# Altium PCB PCB1.PcbDoc
Units mm, origin at the board's own origin, x right, y up, seen from the top; angles counter-clockwise.
Board outline 178.23 x 55.18 mm, 2 copper layers (Top Layer, Bottom Layer); 55 components, 55 nets, 241 pads, 11 vias.
Unrouted connection lines stored in the file: 17.
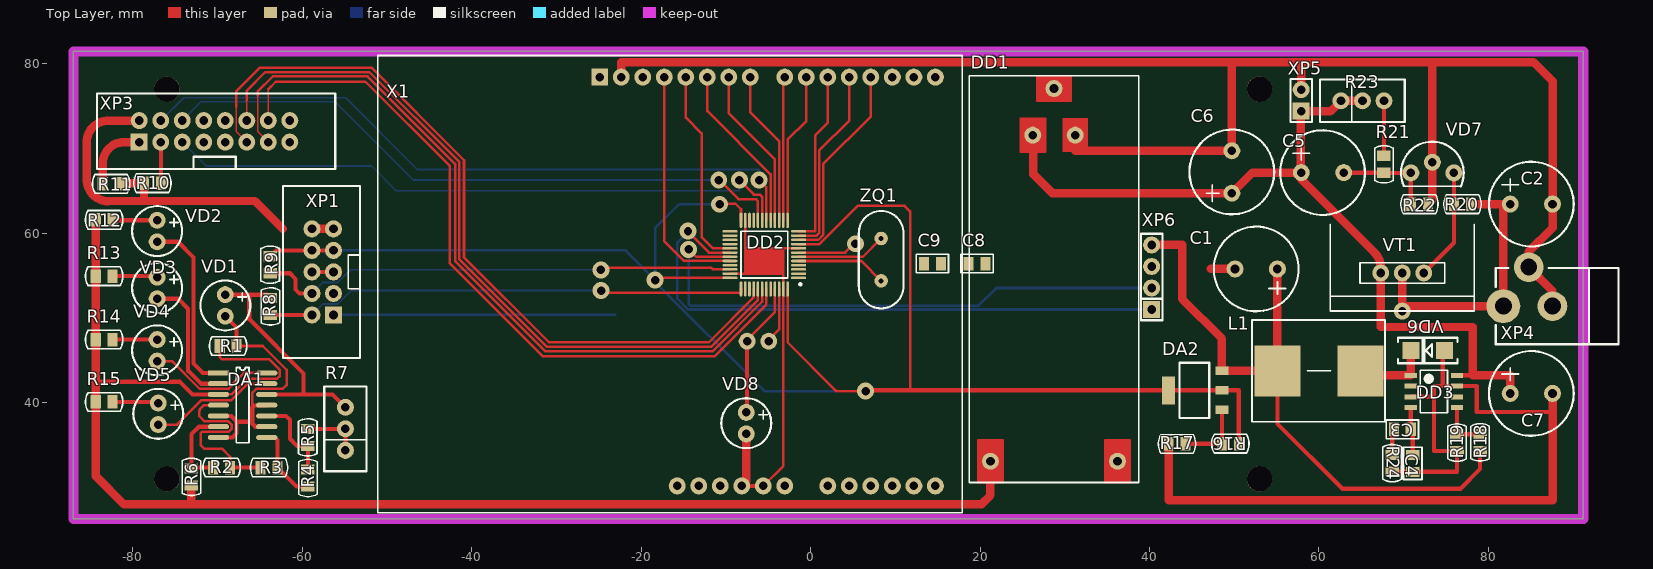
[diagram p0: Top Layer view]
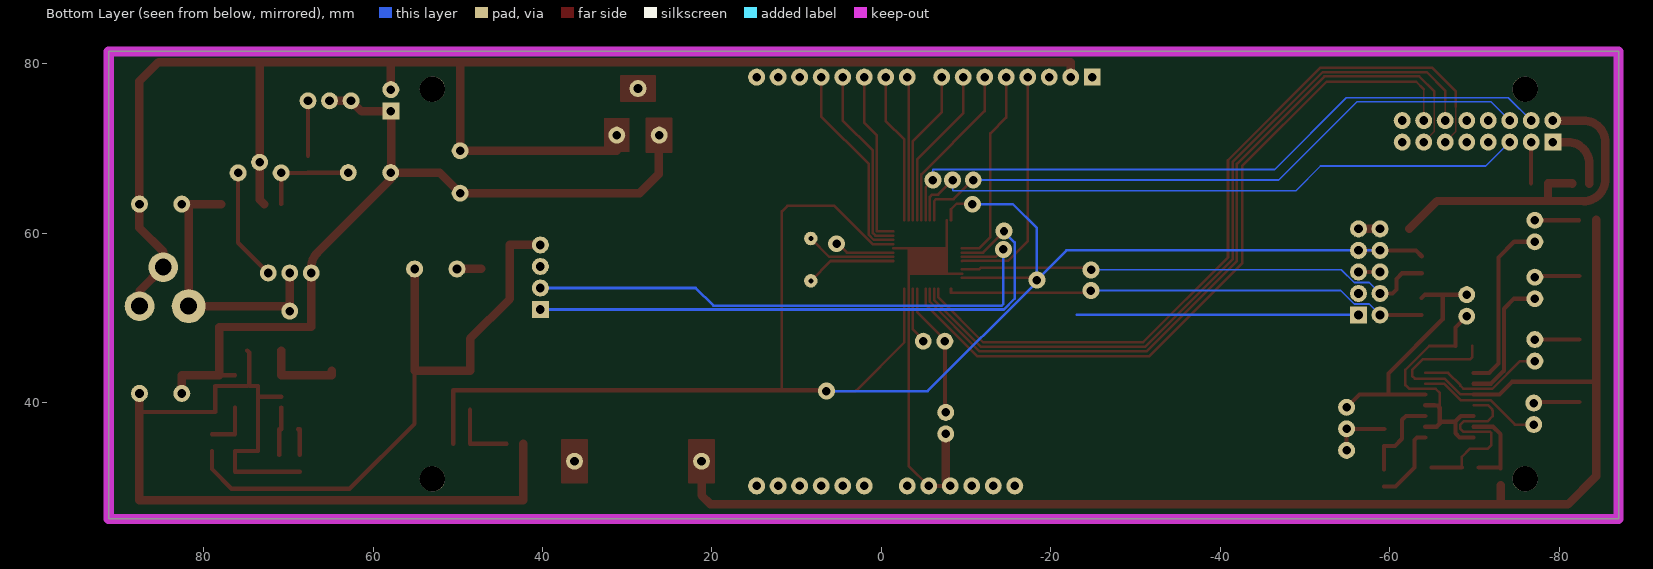
[diagram p1: Bottom Layer view, seen from below]
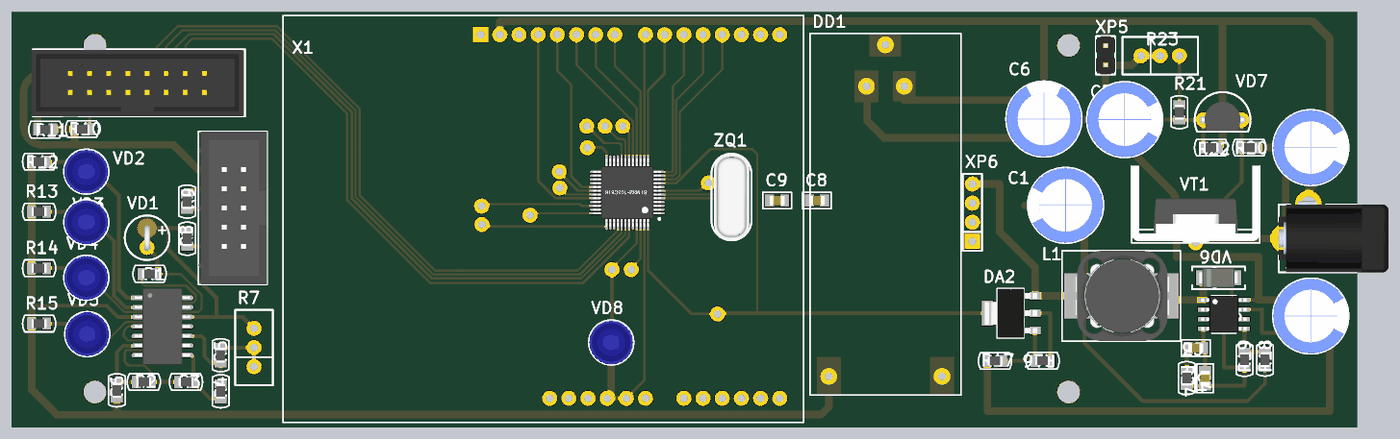
[diagram p2: 3D render of the assembled board from above, using the file's embedded part models]

## Layer stack, top to bottom
Top Solder: solder mask 0.0102, Solder Resist, Dk 3.5
Top Layer: signal copper 0.0356
Dielectric 1: dielectric 0.32, FR-4, Dk 4.8
Bottom Layer: signal copper 0.0356
Bottom Solder: solder mask 0.0102, Solder Resist, Dk 3.5

## Board outline
-87.025,26.3 91.2,26.3 91.2,81.475 -87.025,81.475

## Design rules (kind name [scope] priority, off if disabled: settings)
Clearance Clearance_1 [((ObjectKind = 'Pad') And (Component = 'DD2')) Or ((ObjectKind = 'Net') And (Component = 'DD2')) vs WithinRoom('RoomSTM')] p1: gap=0.19
Clearance [All] p2: gap=0.15
ComponentClearance [All] p1 off: gap=0.254 collisioncheckmode=3 verticalgap=0.254 showdistances=FALSE
Height [All] p1 off: minheight=0 maxheight=25.4 prefheight=12.7
Length [All] p1: maxlimit=2540 minlimit=0
MatchedLengths [InNetClass('SW')] p1: tolerance=10 checknetsindiffpair=TRUE checkdiffpairvsdiffpair=TRUE checkothers=TRUE
PolygonConnect [All] p1: connectstyle=Relief reliefconductorwidth=0.5 reliefentries=4 polygonreliefangle="90 Angle" airgapwidth=0.254
RoomDefinition RoomSTM [InComponentClass('Room Definition 1')] p1: confinementstyle=ConfineIn formatcopy=TRUE lockcomponents=FALSE outline -11.026,51.936 -11.026,63.044 0.082,63.044 0.082,51.936
RoutingVias [All] p1: holewidth=1.04 width=2 viastyle="Through Hole" minholewidth=1 minwidth=2 maxholewidth=1.1 maxwidth=2
SolderMaskExpansion [All] p1: expansion=0.102
UnpouredPolygon [All] p1: allowunpoured=FALSE
Width Width_2 [InNetClass('POWER')] p1: maxlimit=5 minlimit=0.254 preferedwidth=2
Width Width_1 [InNetClass('STM')] p2: maxlimit=0.5 minlimit=0.2 preferedwidth=0.3
Width [All] p3: maxlimit=5 minlimit=0.2 preferedwidth=1
27 further rules are at their usual default settings.

## Classes and differential pairs
component class "Room Definition 1": DD2
net class POWER: 5.0V GND
net class LCD: D4 D5 D6 D7
net class SW: NRST SWCLK SWDIO
net class STM: 3.3V D4 D5 D6 D7 DIR_CLK DIR_EN DIR_LATCH DIR_SER E GND NRST OSCI OSCO PWM0A PWM0B PWM1A PWM1B PWM2A PWM2B R/W RS RX SWCLK SWDIO TX

## Components (designator, comment, footprint, x,y, rotation, side; value= is the part's Value field where it differs from the comment)
C1 "470/16" ECAP_10_5 52.6,55.8 r180 top
C2 "22uF" ECAP_10_5 85.079,63.459 r0 top
C3 "0.01u" C0805 69.85,36.875 r0 top
C4 "100p" C0805 71.075,32.85 r90 top
C5 "4.7uF" ECAP_10_5 60.425,67.175 r0 top
C6 "22uF" ECAP_10_5 49.725,67.25 r90 top
C7 "100/100" ECAP_10_5 85.079,41.107 r0 top
C8 "22p" C0805 19.651,56.436 r0 top
C9 "22p" C0805 14.376,56.436 r0 top
DA1 "*" SOP14 -69.909,43.53 r0 top
DA2 "LM117" SOT-223 45.3,41.475 r90 top
DD1 "REV1.4" 20A8.4ÂREV1.2 18.725,30.6 r0 top
DD2 "*" LQFP-48 -5.472,57.49 r180 top
DD3 "A5975" SOIC8 73.572,41.337 r0 top
L1 "CDRH127/LDNP-220MC" CDRH127 55.107,43.774 r0 top
R1 "510" R0805 -68.766,46.705 r180 top
R2 "1k" R0805 -69.53,32.358 r180 top
R3 "1k" R0805 -63.942,32.358 r180 top
R4 "1k" R0805 -59.343,31.124 r270 top
R5 "15k" R0805 -59.368,35.91 r270 top
R6 "5.1k" R0805 -73.1,31.25 r270 top
R7 "10k" T93YA -54.923,36.926 r90 top
R8 "5.1k" R0805 -63.775,51.375 r270 top
R9 "5.1k" R0805 -63.8,56.3 r270 top
R10 "5.1k" R0805 -77.7,65.925 r180 top
R11 "5.1k" R0805 -82.575,65.85 r180 top
R12 "1k" R0805 -83.4,61.6 r180 top
R13 "1k" R0805 -83.4,54.96 r180 top
R14 "1k" R0805 -83.4,47.467 r180 top
R15 "1k" R0805 -83.4,40.101 r180 top
R16 "2k" R0805 49.55,35.175 r0 top
R17 "3.3k" R0805 43.248,35.142 r0 top
R18 "3.3k" R0805 79.025,35.325 r270 top
R19 "1k" R0805 76.3,35.3 r90 top
R20 "510" R0805 76.951,63.459 r0 top
R21 "100" R0805 67.68,68.158 r90 top
R22 "3.3k" R0805 71.871,63.459 r180 top
R23 "10k" T93YA 65.14,75.651 r0 top
R24 "10k" R0805 68.65,32.875 r90 top
VD1 "BZX55C5V1" DO-35 -69.1,51.5 r270 top
VD2 "RED" LED-5mm -77.15,60.275 r270 top
VD3 "YELLOW" LED-5mm -77.148,53.563 r270 top
VD4 "GREEN" LED-5mm -77.148,46.197 r270 top
VD5 "GREEN" LED-5mm -77.021,38.704 r270 top
VD6 "STPS1L40A" DO-214AC 72.85,46.175 r180 top
VD7 "TL431" TO-92 73.395,67.142 r180 top
VD8 "*" LED-5mm -7.6,37.6 r270 top
VT1 "IRFB3806" TO-220+FK 69.839,55.331 r180 top
X1 "RKP" "ARDUINO SHIELD" -24.9,78.45 r0 top
XP1 "*" IDC10M -57.6,55.45 r180 top
XP3 "*" IDC16M -70.375,72.05 r90 top
XP4 "*" DJK-02-Series 87.619,52.41 r270 top
XP5 "JAMPER" PLS-2 57.9,75.7 r90 top
XP6 "JAMPER" PLS-4 40.248,53.553 r90 top
ZQ1 "*" HC-49S 8.325,56.9 r270 top

## Footprints (in the part's own frame and the unit in brackets; to place one, negate y for a bottom-side part, rotate by r counter-clockwise, add the part's x,y. Pads: shape width x height; smd on the part's side, far side on the other; paste and mask are expansions set on the pad)
20A8.4ÂREV1.2 [mm]
  round 2 hole 1.02: 1(2.5,2.5) 2(17.5,2.5) 3(7.5,41) 4(12.5,41) 5(10,46.5)
  Top Layer region: 1,0 4,0 4,5 1,5
  Top Layer region: 16,0 19,0 19,5 16,5
  Top Layer region: 6,39 9,39 9,43 6,43
  Top Layer region: 11,39 14,39 14,43 11,43
  Top Layer region: 8,45 12,45 12,48 8,48
  Top Layer lines w0.2: 1,0 2.5,0 4,0 4,5 2.5,5 1,5 1,0 ; 6,39 7.5,39 7.575,39 9,39 9,43 6,43 6,39 ; 8,45 10,45 12,45 12,48 8,48 8,45 ; 16,0 16,5 19,5 19,0 16,0
  silkscreen extent 0,0 20,48
"ARDUINO SHIELD" [mm]
  rect 2x2 hole 1.02: 1(0,0)
  round 2 hole 1.02: 2(2.54,0) 3(5.08,0) 4(7.62,0) 5(10.16,0) 6(12.7,0) 7(15.24,0) 8(17.78,0) 9(21.844,0) 10(24.384,0) 11(26.924,0) 12(29.464,0) 13(32.004,0) 14(34.544,0) 15(37.084,0) 16(39.624,0) 17(39.624,-48.26) 18(37.084,-48.26) 19(34.544,-48.26) 20(32.004,-48.26) 21(29.464,-48.26) 22(26.924,-48.26) 23(21.844,-48.26) 24(19.304,-48.26) 25(16.764,-48.26) 26(14.224,-48.26) 27(11.684,-48.26) 28(9.144,-48.26)
  silkscreen extent -26.2,-51.43 42.8,2.54
C0805 [mm] "2012M"
  rect 1.2x1.6 smd: 1(-1,0) 2(1,0)
  silkscreen extent -1.9,-1.1 1.9,1.1, body extent -1,-0.62 1,0.63, height 1.01
CDRH127 [mm]
  rect 5.4x6 smd: 1(0,0) 2(9.8,0)
  silkscreen extent -3,-6 12.7,6, body extent -1.17,-6 11.17,6, height 7
DJK-02-Series [mm]
  round 4 hole 2: 1(1,-5.85)
  round 3.5 hole 2: 2(1,-0.05) 3(-3.6,-2.85)
  silkscreen extent -3.5,-6.75 5.5,7.75, body extent -3.95,-6.75 5.5,7.75, height 11.5
DO-35 [mm]
  round 2 hole 1: 1(-1.27,0) 2(1.27,0)
  silkscreen extent -2.95,-2.95 2.95,2.95, body extent -2.6,-1.33 1.66,1.33, height 6.89
DO-214AC [mm] "(SMA) Low profile package"
  rect 2x2 smd: 1(-2,0) 2(2,0)
  silkscreen extent -3.5,-1.5 3.5,1.5, body extent -2.6,-1.3 2.6,1.3, height 2.4
ECAP_10_5 [mm]
  round 2 hole 1.02: 1(-2.5,0) 2(2.5,0)
  silkscreen extent -5,-5 5,5, body extent -5,-5 5,5, height 20
HC-49S [mm] "HC49 Short Through-hole Mount Footprint"
  round 1.6 hole 0.6: 1(-2.5,0) 3(2.5,0)
  silkscreen extent -5.75,-2.65 5.75,2.65, body extent -5.68,-2.3 5.68,2.35, height 5
IDC10M [mm]
  rect 2x2 / inner rect 1x1.5 / far side rect 2x2 hole 1.02: 1(-1.27,5.08)
  round 2 / inner oval 1x1.5 / far side round 2 hole 1.02: 2(1.27,5.08) 3(-1.27,2.54) 4(1.27,2.54) 5(-1.27,0) 6(1.27,0) 7(-1.27,-2.54) 8(1.27,-2.54) 9(-1.27,-5.08) 10(1.27,-5.08)
  silkscreen extent -4.4,-10.15 4.7,10.15, body extent -4.4,-10.15 4.7,10.15, height 9.3
IDC16M [mm]
  rect 2x2 / inner rect 1x1.5 / far side rect 2x2 hole 1.02: 1(-1.27,8.89)
  round 2 / inner oval 1x1.5 / far side round 2 hole 1.02: 2(1.27,8.89) 3(-1.27,6.35) 4(1.27,6.35) 5(-1.27,3.81) 6(1.27,3.81) 7(-1.27,1.27) 8(1.27,1.27) 9(-1.27,-1.27) 10(1.27,-1.27) 11(-1.27,-3.81) 12(1.27,-3.81) 13(-1.27,-6.35) 14(1.27,-6.35) 15(-1.27,-8.89) 16(1.27,-8.89)
  silkscreen extent -4.45,-14.25 4.45,13.87, body extent -4.5,-14.06 4.4,14.06, height 3.1
LED-5mm [mm]
  round 2 hole 1: 1(-1.27,0) 2(1.27,0)
  silkscreen extent -2.95,-2.95 2.95,2.95, body extent -2.95,-2.95 2.95,2.95, height 3
LQFP-48 [mm] "Thin QFP, 48-Leads, Body 7x7mm, Pitch 0.5mm, IPC Medium Density"
  oval 1.8x0.3 smd: 1(-4.05,2.75) 2(-4.05,2.25) 3(-4.05,1.75) 4(-4.05,1.25) 5(-4.05,0.75) 6(-4.05,0.25) 7(-4.05,-0.25) 8(-4.05,-0.75) 9(-4.05,-1.25) 10(-4.05,-1.75) 11(-4.05,-2.25) 12(-4.05,-2.75) 25(4.05,-2.75) 26(4.05,-2.25) 27(4.05,-1.75) 28(4.05,-1.25) 29(4.05,-0.75) 30(4.05,-0.25) 31(4.05,0.25) 32(4.05,0.75) 33(4.05,1.25) 34(4.05,1.75) 35(4.05,2.25) 36(4.05,2.75)
  oval 0.3x1.8 smd: 13(-2.75,-4.05) 14(-2.25,-4.05) 15(-1.75,-4.05) 16(-1.25,-4.05) 17(-0.75,-4.05) 18(-0.25,-4.05) 19(0.25,-4.05) 20(0.75,-4.05) 21(1.25,-4.05) 22(1.75,-4.05) 23(2.25,-4.05) 24(2.75,-4.05) 37(2.75,4.05) 38(2.25,4.05) 39(1.75,4.05) 40(1.25,4.05) 41(0.75,4.05) 42(0.25,4.05) 43(-0.25,4.05) 44(-0.75,4.05) 45(-1.25,4.05) 46(-1.75,4.05) 47(-2.25,4.05) 48(-2.75,4.05)
  silkscreen extent -4.38,-2.75 2.75,3.62, body extent -4.5,-4.5 4.5,4.5, height 1.6
PLS-2 [mm]
  rect 2x2 hole 1: 1(-1.27,0)
  round 2 hole 1: 2(1.27,0)
  silkscreen extent -2.54,-1.27 2.54,1.27, body extent -2.54,-1.27 2.54,1.27, height 8.9
PLS-4 [mm]
  rect 2x2 hole 1.02: 1(-2.54,0)
  round 2 hole 1.02: 2(0,0) 3(2.54,0) 4(5.08,0)
  silkscreen extent -3.81,-1.27 6.4,1.27, body extent -3.85,-1.25 6.55,1.35, height 9
R0805 [mm] "2012M"
  rect 1.2x1.6 smd: 1(-1,0) 2(1,0)
  silkscreen extent -2.2,-1.1 2.2,1.1, body extent -1,-0.6 1,0.6, height 0.5
SOIC8 [mm] "SOIC, 8-Leads, Body 4,90x3,90mm, Pitch 1,27mm, IPC Medium Density"
  rect 1.45x0.6 smd: 1(-2.725,1.905) 2(-2.725,0.635) 3(-2.725,-0.635) 4(-2.725,-1.905) 5(2.725,-1.905) 6(2.725,-0.635) 7(2.725,0.635) 8(2.725,1.905)
  silkscreen extent -1.6,-2.5 1.6,2.5, body extent -3,-2.45 3,2.45, height 1.75
SOP14 [mm]
  rect 2.5x0.6 smd: 1(0,0)
  oval 2.5x0.6 smd: 2(0,-1.27) 3(0,-2.54) 4(0,-3.81) 5(0,-5.08) 6(0,-6.35) 7(0,-7.62) 8(5.7,-7.62) 9(5.7,-6.35) 10(5.7,-5.08) 11(5.7,-3.81) 12(5.7,-2.54) 13(5.7,-1.27) 14(5.7,0)
  silkscreen extent 2.08,-8.25 3.61,0.64, body extent -0.8,-8.9 6.5,1.3, height 1.1
SOT-223 [mm]
  rect 1x1.5 smd: 1(-2.3,-3.25) 2(0,-3.25) 3(2.3,-3.25)
  rect 3.3x1.5 smd: 2(0,3.05)
  silkscreen extent -3.25,-1.75 3.25,1.75, body extent -3.25,-3.53 3.25,3.43, height 1.65
T93YA [mm]
  round 2 hole 1.02: 1(-2.54,0) 2(0,0) 3(2.54,0)
  silkscreen extent -5,-2.5 5,2.5
TO-92 [mm]
  round 2 hole 1.02: 1(-2.54,0) 2(0,-1.25) 3(2.54,0)
  silkscreen extent -3.7,-3.68 3.7,1.59, body extent -2.84,-2.4 2.84,1.4, height 7.34
TO-220+FK [mm]
  round 2 hole 1.02: 1(-2.54,0) 2(0,0) 3(2.54,0)
  round 2 hole 1: 2(0,4.5)
  silkscreen extent -8.5,-5.72 8.5,4.5, body extent -8.5,-5.72 8.5,4.5, height 23.07

## Part data
C1 C2 C5 C6 C7: library part CAP-E
C3 C4 C8 C9: library part CAP
DA1: library part LM339
DD2: library part STM32F103Cxxx-Series
DD3: "STEP-DOWN"
L1: library part Coil
R1 R2 R3 R4 R5 R6 R8 R9 R10 R11 R12 R13 R14 R15 R16 R17 R18 R19 R20 R21 R22 R24: library part RES
R7 R23: library part "Resistor Trimmers"
VD1: library part Zender
VD2 VD3 VD4 VD5 VD8: library part LED
VD6: library part Diode
VT1: library part MOSFET-N
X1: library part MOTOR_SHIELD
XP1: library part IDC10M
XP3: library part IDC16M
XP4: library part Con-2-M-DP
XP5: library part CONNX2
XP6: library part CONNX4
ZQ1: library part Crystal

## Free pads (board coordinates)
  round 3 hole 3: 0(53,31.025) 1(53,77.025) 2(-76,31.025) 3(-76,77.025)
  round 2 hole 1: 4(-4.95,47.275) 5(-7.5,47.275)

## Via types
v1: diameter 2, hole 1, Top Layer to Bottom Layer, 11 vias

## Nets (pads, with @x,y where several pads share a name; then routed paths per layer and width w, separated by ;. In a path a pad name is that pad's centre, name@x,y a point inside that pad or via, vN(x,y) a via of type N, cw(c..) or ccw(c..) an arc to the next point about the centre after c; other vN are vias at no path point)
3.3V: DA2.2 DD2.9 DD2.24 DD2.36 DD2.48 R9.1 R16.2 XP1.7 XP1.8 | length 212.9
  Top Layer w0.3: v1(-18.355,54.489) -18.36,54.494 -18.36,54.74 DD2.36 ; v1(-10.754,63.439) -10.754,63.525 -8.9,63.525 -8.222,62.847 DD2.24 ; DD2.48 -2.722,47.147 2.95,41.475 ; DD2.9 1.032,58.74 5.542,63.25 11.1,63.25 11.75,62.6 11.75,41.475 ; 3.05,41.375 v1(6.5,41.375) v1@6.6,41.475
  Top Layer w0.5: R9.1 -63.11,57.99 XP1.8 XP1.7 ; v1@6.6,41.475 11.75,41.475 42.25,41.475 48.55,41.475 50.55,41.475 R16.2
  Bottom Layer w0.3: XP1.8 XP1.7 -21.856,57.99 v1(-18.355,54.489) ; v1(-10.754,63.439) -15.536,63.439 -18.355,60.62 v1(-18.355,54.489) ; v1(6.5,41.375) -5.454,41.375 -18.355,54.275 v1(-18.355,54.489)
5.0V: C1.1 DA2.3 L1.1 R10.2 R11.1 R18.2 X1.26 XP1.9 XP1.10 XP3.2 XP6.4 | length 121.1
  Top Layer w0.5: L1.1 55.107,37.518 62.775,29.85 76.7,29.85 79.025,32.175 R18.2
  Top Layer w1: R11.1 -81.575,65.925 R10.2 -78.7,63.825 ; XP3.2 -82.91,73.32 ccw(c-82.91,70.78) -85.45,70.78 -85.45,66.34 ccw(c-82.91,66.34) -82.91,63.8 -82.91,63.825 -78.7,63.825 ; -62.305,60.53 -65.6,63.825 -78.7,63.825 ; XP1.10 XP1.9 ; XP6.4 43.85,58.633 43.85,52.275 48.55,47.575 DA2.3 L1.1 55.107,55.8 C1.1
+12V: C2.1 R20.2 VT1.2 XP4.1 | length 31.7
  Top Layer w1: VT1.2@69.839,55.331 69.839,51.41 XP4.1 81.769,63.459 R20.2
+BAT: C5.1 C6.1 C7.1 DA1.3 DD1.1 DD1.3 DD3.8 R1.2 R6.2 R12.2 R13.2 R14.2 R15.2 R23.1 R23.2 VT1.3 X1.23 XP5.1 | length 277
  Top Layer w0.3: DA1.3 -68.355,40.99 -66.485,42.86 -62.99,42.86 -62.659,43.191 -62.659,43.85 -63.959,45.15 -69.525,45.15 -69.766,45.391 R1.2
  Top Layer w0.5: -84.4,42.475 -74.45,42.475 -72.965,40.99 DA1.3 ; DD3.8 78.175,43.242
  Top Layer w1: R12.2 R13.2 R14.2 -84.4,42.475 R15.2 -84.4,31.35 -81.05,28 -72.848,28 -72.824,28.024 20.174,28.024 21.225,29.075 21.225,30.6 DD1.1 ; -73.1,28.252 R6.2 ; DD1.3 26.3,71.525 26.3,69.6 26.3,66.975 28.525,64.75 C6.1 52.15,67.175 C5.1 ; R23.2 R23.1 61.349,74.4 57.87,74.4 57.87,67.23 C5.1 ; C7.1 82.579,43.242 78.175,43.242 78.175,48.95 67.299,48.95 VT1.3 67.299,55.949 ccw(c64.759,55.949) 66.555,57.745 57.925,66.375 C5.1
-BAT: DD1.2
D4: DD2.40 XP3.11 | length 92.1
  Top Layer w0.2: -67.815,74.93 -67.815,72.03 XP3.11
  Top Layer w0.3: -67.815,74.93 -67.815,76.76 -65,79.575 -51.865,79.575 -40.925,68.635 -40.925,57.16 -30.915,47.15 -12.025,47.15 -6.722,52.453 DD2.40
D5: DD2.41 XP3.12 | length 88.5
  Top Layer w0.2: XP3.12 -66.565,75.685
  Top Layer w0.3: -66.565,75.685 -66.565,76.86 -64.4,79.025 -52.093,79.025 -41.475,68.407 -41.475,56.932 -31.143,46.6 -11.766,46.6 -6.222,52.144 DD2.41
D6: DD2.42 XP3.13 | length 90.9
  Top Layer w0.2: -65.275,76.27 -65.275,72.03 XP3.13
  Top Layer w0.3: -65.275,76.27 -65.275,76.75 -63.5,78.525 -52.3,78.525 -41.975,68.2 -41.975,56.725 -31.35,46.1 -11.55,46.1 -5.722,51.928 DD2.42
D7: DD2.43 XP3.14 | length 87.4
  Top Layer w0.2: XP3.14 -64.025,77.025
  Top Layer w0.3: -64.025,77.025 -63.15,77.9 -52.559,77.9 -42.6,67.941 -42.6,56.466 -31.609,45.475 -11.35,45.475 -5.222,51.603 DD2.43
DIR_CLK: DD2.11 X1.12 | length 22.4
  Top Layer w0.3: DD2.11 0.703,59.74 1,60.037 1,69.775 4.564,73.339 X1.12
DIR_EN: DD2.14 X1.9 | length 17
  Top Layer w0.3: DD2.14 -3.212,61.55 -3.212,78.294 X1.9
DIR_LATCH: DD2.32 X1.4 | length 28.1
  Top Layer w0.3: X1.4 -17.28,59.055 -14.975,56.75 -9.532,56.75 DD2.32
DIR_SER: DD2.15 X1.8 | length 18.3
  Top Layer w0.3: X1.8 -7.12,74.295 -3.722,70.897 DD2.15
E: DD2.20 XP3.6 | length 76.2
  Top Layer w0.2: v1@-10.85,66.05 v1(-10.85,66.3)
  Top Layer w0.3: v1@-10.775,66.3 -8.525,64.05 -6.475,64.05 -6.222,63.797 DD2.20
  Bottom Layer w0.2: XP3.6 -71.98,75.525 -56.15,75.525 -46.925,66.3 v1(-10.85,66.3)
FREE_PAD_45: DD2.45 pad.5 VD8.1 | length 15.9
  Top Layer w0.3: pad.5@-7.587,47.363 -4.222,50.728 DD2.45
  Top Layer w0.5: VD8.1 -7.5,38.97 pad.5
FREE_PAD_46: DD2.46 pad.4 | length 6.6
  Top Layer w0.3: pad.4@-5.025,47.375 -3.722,48.678 DD2.46
GND: C1.2 C2.2 C4.1 C6.2 C7.2 C8.2 C9.1 DA1.12 DD1.4 DD2.8 DD2.23 DD2.35 DD2.47 DD3.3 DD3.7 R7.3 R8.1 R11.2 R17.1 R19.1 R22.1 R24.1 VD1.1 VD6.1 VD7.2 VD8.2 X1.2 X1.24 X1.25 XP1.5 XP1.6 XP3.1 XP4.2 XP4.3 XP5.2 XP6.3 | length 399.1
  Top Layer w0.3: DD2.35 -3.225,55.24 DD2.47@-3.225,53.44 ; DD2.23 -7.722,58.24 -3.222,58.24 ; X1.24 -3.225,32.561 DD2.47@-3.225,53.44 ; DD2.8 -3.222,58.24 ; DD2.47@-3.225,53.44 DD2.47 -3.222,58.24
  Top Layer w0.5: VD1.1 -66.275,52.77 ; DA1.12 -59.875,40.99 ; R8.1 -64.17,52.77 -66.275,52.77 ; XP1.6 XP1.5 ; R7.3 -56.447,40.99 -59.875,40.99 ; X1.25@-7.6,30.19 X1.24 ; R24.1 68.65,31.85 C4.1 76.3,31.85 R19.1 73.575,34.3 73.575,40.702 ; DD3.3 73.575,40.702 ; 74.85,41.972 DD3.7 78.625,41.972 78.625,38.9 87.579,38.9 ; VD6.1 74.625,45.95 74.625,41.972 73.575,41.972 73.575,40.702 ; -66.275,52.77 -66.275,49.875 -59.875,43.475 -59.875,40.99
  Top Layer w1: R11.2 -83.575,68.24 cw(c-81.035,68.24) -81.035,70.78 XP3.1 ; X1.2 -22.36,80.225 49.725,80.225 ; X1.25@-7.6,30.726 VD8.2 ; DD1.4 31.225,69.75 C6.2 49.725,80.225 ; R17.1 42.248,28.5 87.579,28.5 87.579,38.9 C7.2 ; 47.225,55.8 C1.2 ; XP5.2 57.9,80.175 57.85,80.225 ; R22.1 73.395,63.983 VD7.2 73.395,80.025 ; XP4.2 87.569,53.21 XP4.3 84.769,57.844 87.579,60.654 C2.2 87.579,77.971 85.325,80.225 57.85,80.225 ; 49.725,80.225 57.85,80.225
NetC3_1: C3.1 R24.2 | length 3.2
  Top Layer w0.5: R24.2 68.65,36.875 C3.1
NetC3_2: C3.2 C4.2 DD3.4 | length 5.8
  Top Layer w0.5: DD3.4 70.85,39.432 C3.2 71.075,36.875 C4.2
NetC5_2: C5.2 R21.1 R22.2 VD7.3 | length 11.1
  Top Layer w0.5: C5.2@63.392,67.158 R21.1 ; R21.1@67.696,67.142 VD7.3 70.855,63.475 R22.2
NetDA1_1: DA1.1 VD2.2 | length 21
  Top Layer w0.5: VD2.2 -74.705,59.005 -72.85,57.15 -72.85,44.625 -71.755,43.53 DA1.1
NetDA1_2: DA1.2 VD3.2 | length 15.7
  Top Layer w0.5: VD3.2 -74.693,52.293 -73.5,51.1 -73.5,43.795 -71.965,42.26 DA1.2
NetDA1_4: DA1.4 R2.1 R3.2 | length 22.2
  Top Layer w0.3: DA1.4 -71.605,39.72 -72.125,39.2 -72.125,39.1 -72.175,39.05 -72.175,38.425 -71.6,37.85 -68.78,37.85 -68.359,37.429 -68.359,36.931 -68.71,36.58 -71.87,36.58 -72.025,36.425 -72.025,35 -71.575,34.55 -69.45,34.55 -68.53,33.63 R2.1
  Top Layer w0.5: R2.1 R3.2
NetDA1_5: DA1.5 DA1.7 DA1.9 DA1.11 R1.1 VD1.2 | length 32.7
  Top Layer w0.3: R1.1 -64.68,46.705 -61.875,43.9 -61.875,42.1 -62.325,41.65 -65.45,41.65 -65.925,41.175 -65.925,39.425
  Top Layer w0.5: DA1.7 -68.265,35.91 -67.775,36.4 -67.775,37.825 -68.4,38.45 DA1.5 ; VD1.2 -67.766,48.896 R1.1 ; -67.725,37.775 -66.15,37.775 -65.925,37.55 ; DA1.9 -65.555,37.18 -65.925,37.55 ; DA1.11 -65.305,39.72 -65.35,39.675 -65.675,39.675 -65.925,39.425 -65.925,37.55
NetDA1_6: DA1.6 R2.2 R6.1 | length 10.2
  Top Layer w0.5: R2.2 -72.992,32.358 R6.1 -73.1,36.3 -72.22,37.18 DA1.6
NetDA1_8: DA1.8 R3.1 R4.2 | length 9.2
  Top Layer w0.5: DA1.8 -63.244,35.91 -62.942,35.608 R3.1 -60.708,30.124 R4.2
NetDA1_10: DA1.10 R4.1 R5.2 | length 10.4
  Top Layer w0.5: DA1.10 -61.925,38.45 -61.475,38 -61.475,35.75 -60.635,34.91 R5.2 -59.343,34.885 R4.1
NetDA1_13: DA1.13 VD5.2 | length 14.8
  Top Layer w0.3: VD5.2 -74.794,37.434 -71.908,40.32 -68.389,40.32 -66.449,42.26 DA1.13
NetDA1_14: DA1.14 VD4.2 | length 15.1
  Top Layer w0.3: VD4.2 -75.41,44.927 -72.143,41.66 -68.71,41.66 -68.359,42.011 -68.359,42.091 -66.92,43.53 DA1.14
NetDA2_1: DA2.1 R16.1 R17.2 | length 8.3
  Top Layer w0.5: R17.2 44.248,35.175 R16.1 DA2.1
NetDD3_1: DD3.1 L1.2 VD6.2 | length 9.4
  Top Layer w1: L1.2 64.907,43.242 DD3.1 70.847,46.175 VD6.2
NetDD3_5: DD3.5 R18.1 R19.2 | length 5.9
  Top Layer w0.5: DD3.5 76.3,39.432 R19.2 R18.1@79.025,36.3
NetR5_1: R5.1 R7.1 R7.2 | length 7
  Top Layer w0.5: R5.1 -54.939,36.91 R7.2 R7.1
NetR10_1: R10.1 XP3.3 | length 4.9
  Top Layer w0.5: R10.1 XP3.3@-76.7,70.78
NetR12_1: R12.1 VD2.1 | length 5.2
  Top Layer w0.5: R12.1@-82.345,61.545 VD2.1
NetR13_1: R13.1 VD3.1 | length 5.1
  Top Layer w0.5: R13.1 VD3.1@-77.275,54.96
NetR14_1: R14.1 VD4.1 | length 5.3
  Top Layer w0.5: R14.1 VD4.1
NetR15_1: R15.1 VD5.1 | length 5.3
  Top Layer w0.5: R15.1 VD5.1@-77.148,40.101
NetR20_1: R20.1 VD7.1 VT1.1 | length 13.3
  Top Layer w0.5: VT1.1 75.951,58.903 R20.1 VD7.1@75.951,67.126
NetR21_2: R21.2 R23.3 | length 6.5
  Top Layer w0.5: R21.2 R23.3
NRST: DD2.7 XP1.1 | length 40.4
  Top Layer w0.3: DD2.7 4.071,57.74 5.106,58.775 v1(5.275,58.775)
  Bottom Layer w0.3: XP1.1 -23.075,50.37
OSCI: C8.1 DD2.5 ZQ1.3 | length 10.7
  Top Layer w0.3: DD2.5 5.985,56.74 ZQ1.3
OSCO: C9.2 DD2.6 ZQ1.1 | length 10.6
  Top Layer w0.3: DD2.6 6.165,57.24 ZQ1.1
PWM0A: DD2.13 X1.10 | length 17.8
  Top Layer w0.3: DD2.13 -2.722,71.078 -0.516,73.284 X1.10
PWM0B: DD2.12 X1.11 | length 20.8
  Top Layer w0.3: DD2.12 -1.412,60.23 0.55,60.23 0.55,71.6 2.024,73.074 X1.11
PWM1A: DD2.16 X1.7 | length 19.2
  Top Layer w0.3: X1.7 -9.66,74.167 -4.222,68.729 DD2.16
PWM1B: DD2.17 X1.6 | length 20
  Top Layer w0.3: X1.6 -12.2,74.45 -4.722,66.972 DD2.17
PWM2A: DD2.29 X1.5 | length 23.5
  Top Layer w0.3: X1.5 -14.74,73.665 -12.875,71.8 -12.875,59.6 -11.515,58.24 DD2.29
PWM2B: DD2.10 X1.13 | length 24.1
  Top Layer w0.3: DD2.10 0.896,59.24 1.48,59.824 1.48,68.18 7.104,73.804 X1.13
R/W: DD2.19 XP3.5 | length 75.7
  Top Layer w0.3: v1(-8.425,66.3) -6.7,64.575 -6,64.575 -5.722,64.297 DD2.19
  Bottom Layer w0.2: XP3.5 -71.355,67.95 -51.85,67.95 -48.95,65.05 -8.425,65.05 v1(-8.425,66.3)
RS: DD2.18 XP3.4 | length 81.6
  Top Layer w0.3: v1(-6.075,66.3) -5.222,65.447 DD2.18
  Bottom Layer w0.2: XP3.4 -74.02,76.025 -54.9,76.025 -46.425,67.55 -6.075,67.55 v1(-6.075,66.3)
RX: DD2.31 XP6.2 | length 67.5
  Top Layer w0.3: v1(-14.405,58.114) -14.515,58.004 -14.294,58.004 -13.531,57.24 DD2.31
  Bottom Layer w0.3: v1(-14.405,58.114) -14.405,51.655 -14.213,51.463 19.838,51.463 21.928,53.553 XP6.2
SWCLK: DD2.37 R8.2 XP1.2 | length 57.3
  Top Layer w0.3: v1(-24.725,53.25) -24.45,52.975 -8.222,52.975 DD2.37
  Top Layer w0.5: R8.2 -58.875,50.375 XP1.2
  Bottom Layer w0.2: XP1.2 -57.58,51.66 -55.812,51.66 -54.222,53.25 v1(-24.725,53.25)
SWDIO: DD2.34 R9.2 XP1.4 | length 57.3
  Top Layer w0.3: v1(-24.775,55.7) -24.525,55.95 -11.75,55.95 -11.54,55.74 DD2.34
  Top Layer w0.5: R9.2 -61.475,55.3 -60.8,54.625 -60.8,53.375 -60.335,52.91 XP1.4
  Bottom Layer w0.2: XP1.4 -57.58,54.2 -55.812,54.2 -54.312,55.7 v1(-24.775,55.7)
TX: DD2.30 XP6.1 | length 71.4
  Top Layer w0.3: v1@-14.509,60.234 v1@-14.48,60.205 ; v1(-14.48,60.264) v1@-14.48,60.205 ; v1@-14.475,59.858 -14.48,59.862 v1@-14.48,60.205 ; DD2.30 -12.015,57.74 v1@-14.48,60.205
  Bottom Layer w0.3: v1(-14.48,60.264) -14.48,60.185 -15.725,58.939 -15.725,52.282 -14.456,51.013 XP6.1
pads on no net: DD1.5 DD2.1 DD2.2 DD2.3 DD2.4 DD2.21 DD2.22 DD2.25 DD2.26 DD2.27 DD2.28 DD2.33 DD2.38 DD2.39 DD2.44 DD3.2 DD3.6 X1.1 X1.3 X1.14 X1.15 X1.16 X1.17 X1.18 X1.19 X1.20 X1.21 X1.22 X1.27 X1.28 XP1.3 XP3.7 XP3.8 XP3.9 XP3.10 XP3.15 XP3.16

## Polygon pours and split planes (outlines as drawn)
GND on Top Layer "GND MASKA TOP" (solid, shelved, pour order 2): -87.025,81.475 -87.025,26.3 91.2,26.3 91.2,81.475

## Keep-outs
Keep-Out Layer:
  the board outline again, w1.2

## Other copper
Top Layer:
  region net GND: -7.85,58.24 -3.222,58.24 -3.222,55.24 -7.85,55.24